# EAGLE board XiaomiWeatherStation (EAGLE 9.6.2)
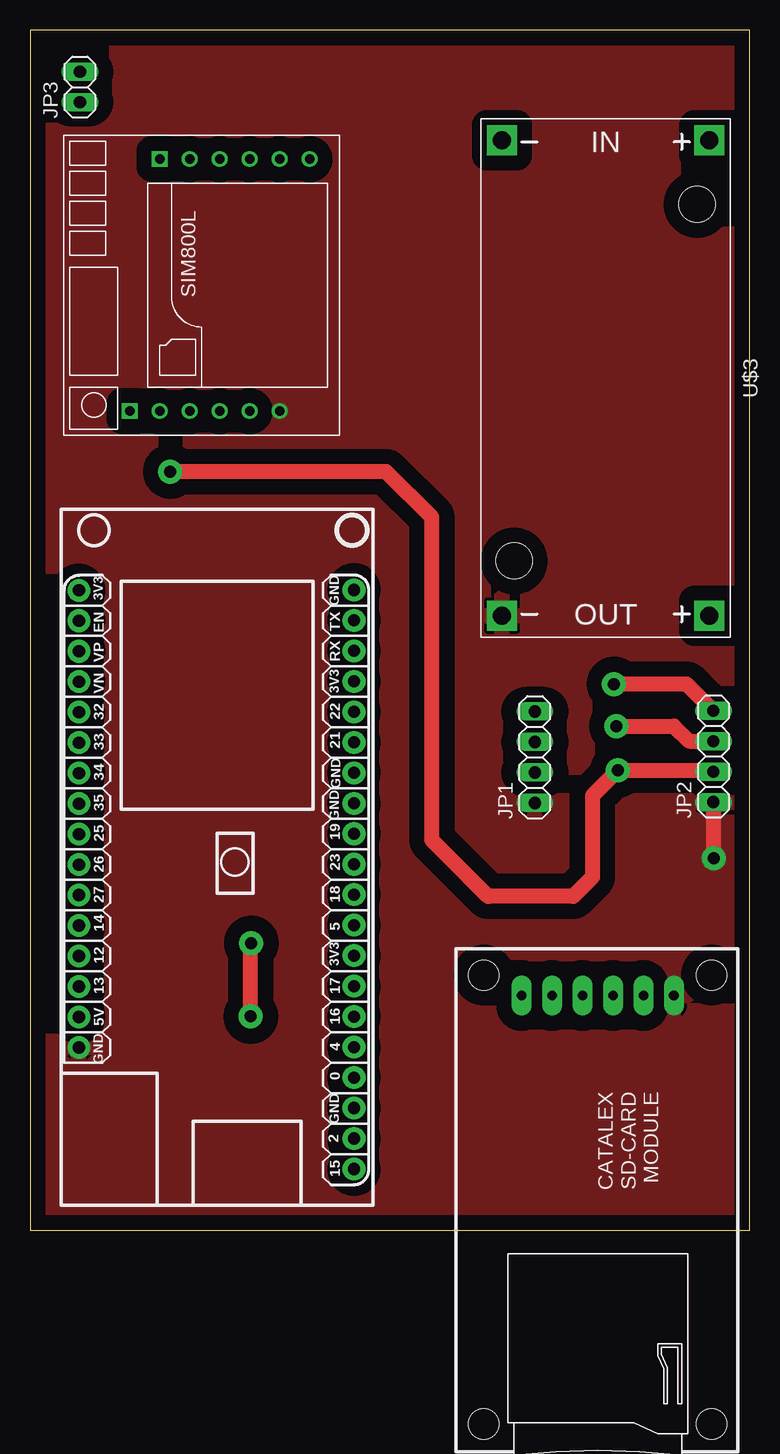
[diagram p0: board, top side]
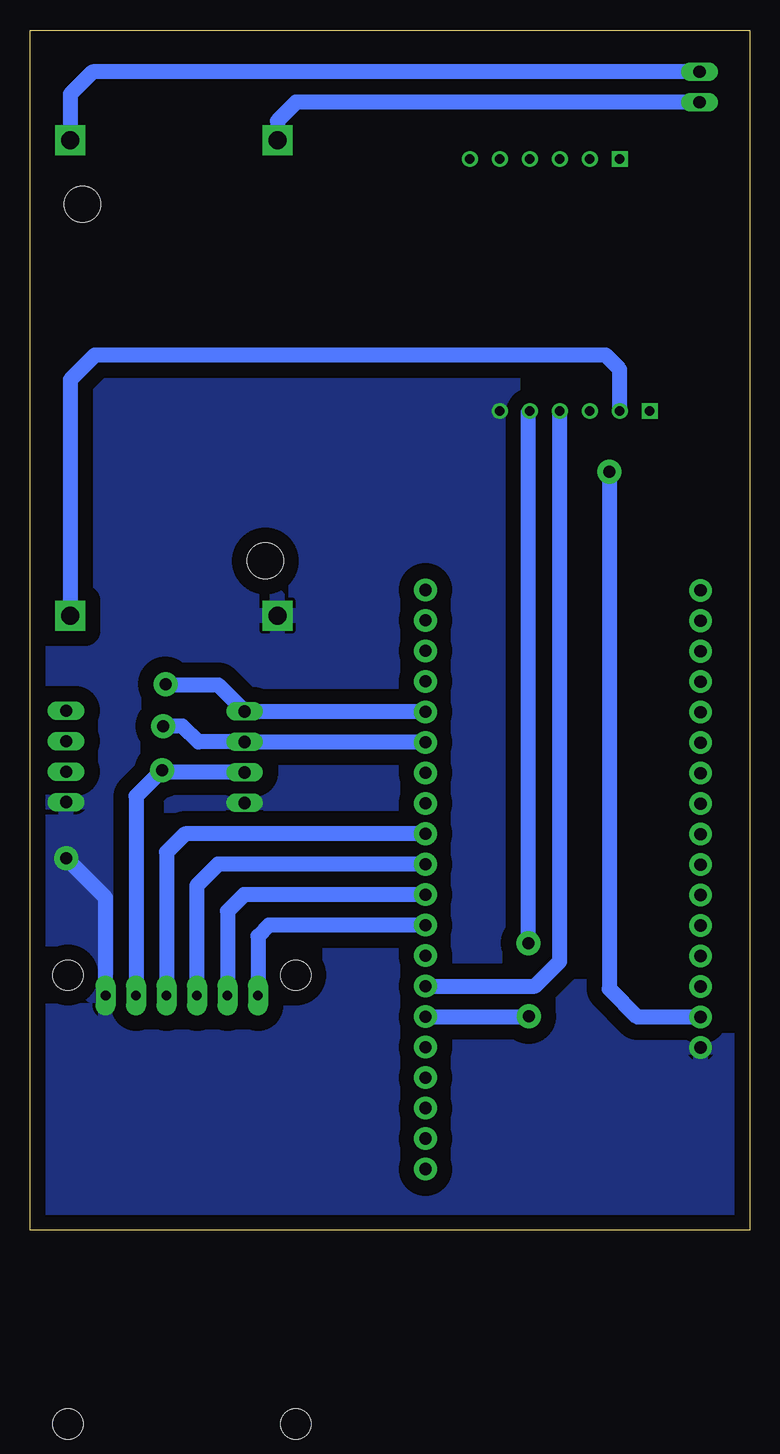
[diagram p1: board, bottom side, seen from below]

Size 60 x 100 mm. Coordinates in mm from the lower left corner, seen from the top.
Outline: 0,0 60,0 60,100 0,100 0,0
Copper layers (1*16): Top 0.035mm / dielectric 1.5mm / Bottom 0.035mm
Design rules "default *": minimum track width 6mil, minimum drill 0.35mm, track to track 1mm, track to pad 0.9mm, pad to pad 6mil, via to via 1mm, smd to smd 6mil, copper to edge 40mil, drill to drill 6mil, minimum pad ring 10mil, minimum via ring 8mil, stop-mask expansion 4mil, vias tented up to drill 0mil, thermal gap 10mil

## Footprints (pad centres in the part's own frame; a part is rotated, then mirrored left to right if it is on the bottom)
SSFD_LOLIN32_WEMOS_CHINA_W_BATT = drill 1.016 pad 1.88: 0 11.43,-22.86; 2 11.43,-27.94; 3V3A -11.51,17.75; 3V3B 11.43,10.16; 3V3C 11.43,-12.7; 4 11.43,-20.32; 5 11.43,-10.16; 5V -11.51,-17.81; 12 -11.51,-12.73; 13 -11.51,-15.27; 14 -11.51,-10.19; 15 11.43,-30.48; 16 11.43,-17.78; 17 11.43,-15.24; 18 11.43,-7.62; 19 11.43,-2.54; 21 11.43,5.08; 22 11.43,7.62; 23 11.43,-5.08; 25 -11.51,-2.57; 26 -11.51,-5.11; 27 -11.51,-7.65; 32 -11.51,7.59; 33 -11.51,5.05; 34 -11.51,2.51; 35 -11.51,-0.03; EN -11.51,15.21; GNDA -11.51,-20.35; GNDB 11.43,17.78; GNDC 11.43,2.54; GNDD 11.43,0; GNDE 11.43,-25.4; RX 11.43,12.7; TX 11.43,15.24; VN -11.51,10.13; VP -11.51,12.67
1X04 = drill 1.016 long: 1 -3.81,0; 2 -1.27,0; 3 1.27,0; 4 3.81,0
1X02 = drill 1.016 long: 1 -1.27,0; 2 1.27,0
CARD-SD-ADAPTER-CATALEX = drill 0.8 pad 1.676 long: CS -17,-6.35; GND -17,6.35; MISO -17,1.27; MOSI -17,-1.27; SCK -17,-3.81; VCC5V -17,3.81 | hole 2.5: -18.7,9.5; 18.7,9.5; 18.7,-9.5; -18.7,-9.5
SIM800LMODULE = drill 0.8: DTR 10.5,1; GND -10.5,-6.5; MIC+ 10.5,-1.5; MIC- 10.5,-4; RST -10.5,1; RX -10.5,-1.5; SPK+ 10.5,-6.5; SPK- 10.5,-9; TX -10.5,-4; VCC -10.5,3.5 | drill 0.8 square: NET -10.5,6; RING 10.5,3.5
DC-DC-STEP-DOWN-LM2596 = drill 1.5 pad 2.5 square: IN+ -19.812,8.636; IN- -19.812,-8.636; OUT+ 19.812,8.636; OUT- 19.812,-8.636 | hole 3: -14.478,7.62; 15.24,-7.62

## Placement (x,y rotation side)
IC1  [SSFD_LOLIN32_WEMOS_CHINA_W_BATT]  15.59,35.56 0 top
JP1  [1X04]  42.1,39.4 90 top
JP2  [1X04]  56.99,39.47 90 top
JP3  [1X02]  4.16,95.25 90 top
MOD1  CARD-SD-ADAPTER-CATALEX  [CARD-SD-ADAPTER-CATALEX]  47.34,2.54 270 top
U$1  SIM800LMODULE  [SIM800LMODULE]  14.32,78.74 90 top
U$3  DC-DC-STEP-DOWN-LM2596  [DC-DC-STEP-DOWN-LM2596]  48,71 270 top

## Library data of the parts
IC1 = SSFD - ESP32 WEMOS LOLIN CHINA W_BATT
JP1-JP3 = pinhead
MOD1 = SD-Card-Module_CATALEX
U$1 = SIM800LMODULE
U$3 = diy-modules

## Nets
3V7: U$1.VCC U$3.OUT+
5V: IC1.5V JP1.2 JP2.2 MOD1.VCC5V
GND: IC1.GNDA JP1.1 JP2.1 MOD1.GND U$1.GND U$3.OUT-
IN+: JP3.2 U$3.IN+
IN-: JP3.1 U$3.IN-
MISO: IC1.19 MOD1.MISO
MOSI: IC1.23 MOD1.MOSI
RXD2: IC1.16 U$1.TX
SCK: IC1.18 MOD1.SCK
SCL: IC1.22 JP1.4 JP2.4
SDA: IC1.21 JP1.3 JP2.3
SS: IC1.5 MOD1.CS
TXD2: IC1.17 U$1.RX

## Tracks (layer width: path | path; a pad name or v marks a point on that pad's centre or on a via)
3V7
  Bottom 1.27: U$1.VCC 10.82,71.72 12,72.9 54.6,72.9 56.64,70.86 U$3.OUT+
5V  (via drill 1 pad 2)
  Top 1.27: JP2.2 56.89,38.3 v49,38.3 46.9,36.2 46.9,29.4 45.3,27.8 38.2,27.8 33.5,32.5 33.5,59.4 29.7,63.2 v11.7,63.2
  Bottom 1.27: JP1.2 48.83,38.13 v49,38.3 51.15,36.15 MOD1.VCC5V | v11.7,63.2 11.7,20.1 9.35,17.75 IC1.5V
GND  (via drill 1 pad 2)
  Top 1.27: v57,31 JP2.1
  Bottom 1.27: MOD1.GND 53.69,27.69 v57,31
  pour Top (isolate 1.27): 0,0 60,0 60,100 0,100
  pour Bottom (isolate 1.27): 0,0 60,0 60,100 0,100
IN+
  Bottom 1.27: JP3.2 54.78,96.52 56.64,94.66 U$3.IN+
IN-
  Bottom 1.27: JP3.1 37.82,93.98 39.36,92.44 U$3.IN-
MISO
  Bottom 1.27: IC1.19 47.08,33.02 48.61,31.49 MOD1.MISO
MOSI
  Bottom 1.27: IC1.23 44.32,30.48 46.1,28.7 46.1,19.57 MOD1.MOSI
RXD2  (via drill 1 pad 2)
  Top 1.27: v18.4,17.8 18.4,23.9 v18.45,23.9
  Bottom 1.27: IC1.16 18.42,17.78 v18.4,17.8 | v18.45,23.9 18.45,68.11 U$1.TX
SCK
  Bottom 1.27: IC1.18 42.16,27.94 43.53,26.57 MOD1.SCK
SCL  (via drill 1 pad 2)
  Top 1.27: JP2.4 54.77,45.5 v48.7,45.5
  Bottom 1.27: IC1.22 42.07,43.18 JP1.4 44.29,45.4 48.7,45.4 v48.7,45.5
SDA  (via drill 1 pad 2)
  Top 1.27: v48.9,42 53.7,42 54.96,40.74 JP2.3
  Bottom 1.27: IC1.21 42.07,40.64 JP1.3 45.97,40.67 47.3,42 v48.9,42
SS
  Bottom 1.27: IC1.5 40.1,25.4 41,24.5 MOD1.CS
TXD2
  Bottom 1.27: U$1.RX 15.82,22.38 17.88,20.32 IC1.17